# EAGLE board fish_tank_Mosfet_driver (EAGLE 7.5.0)
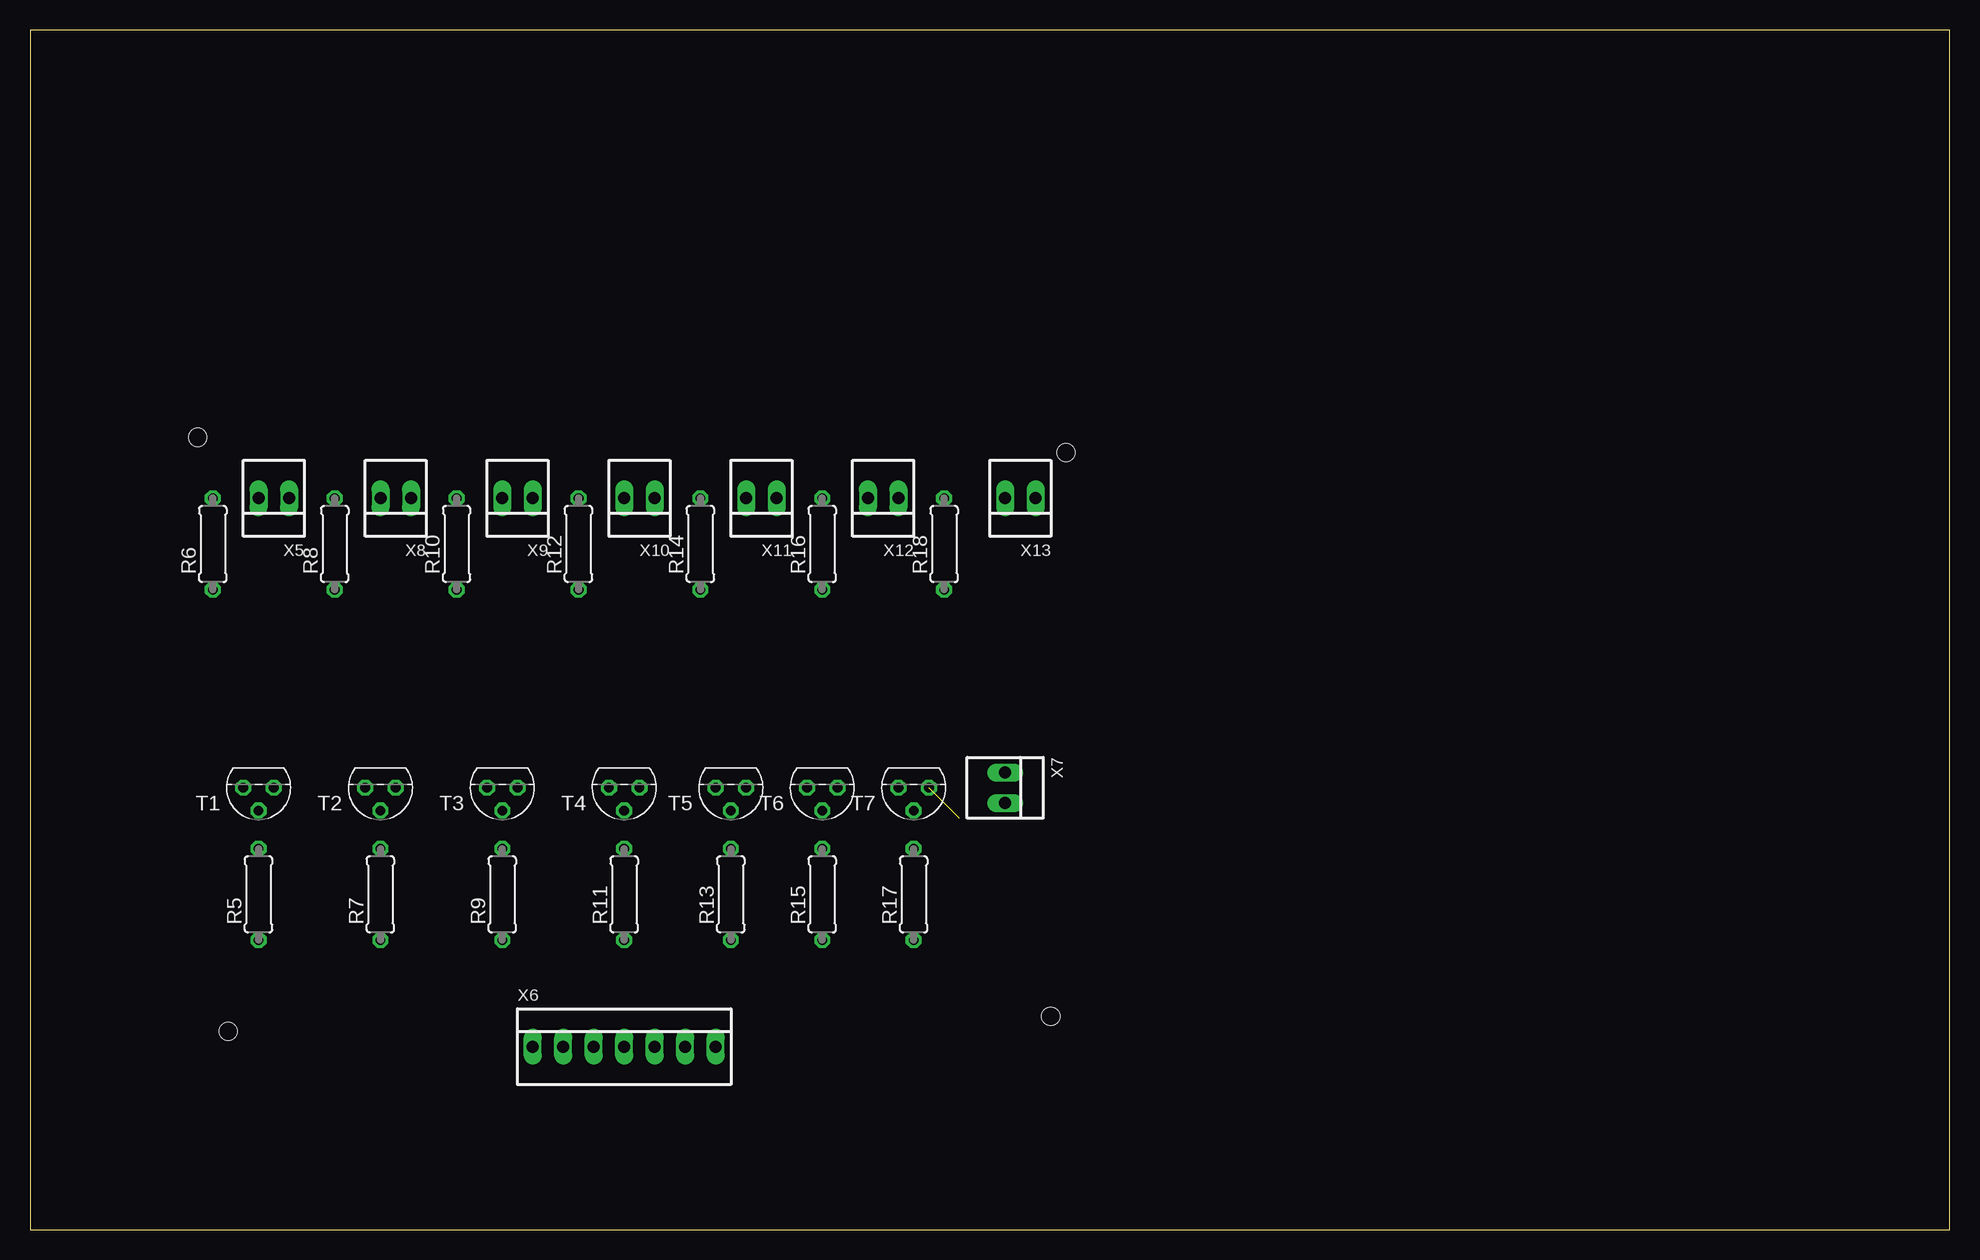
[diagram p0: board, top side]
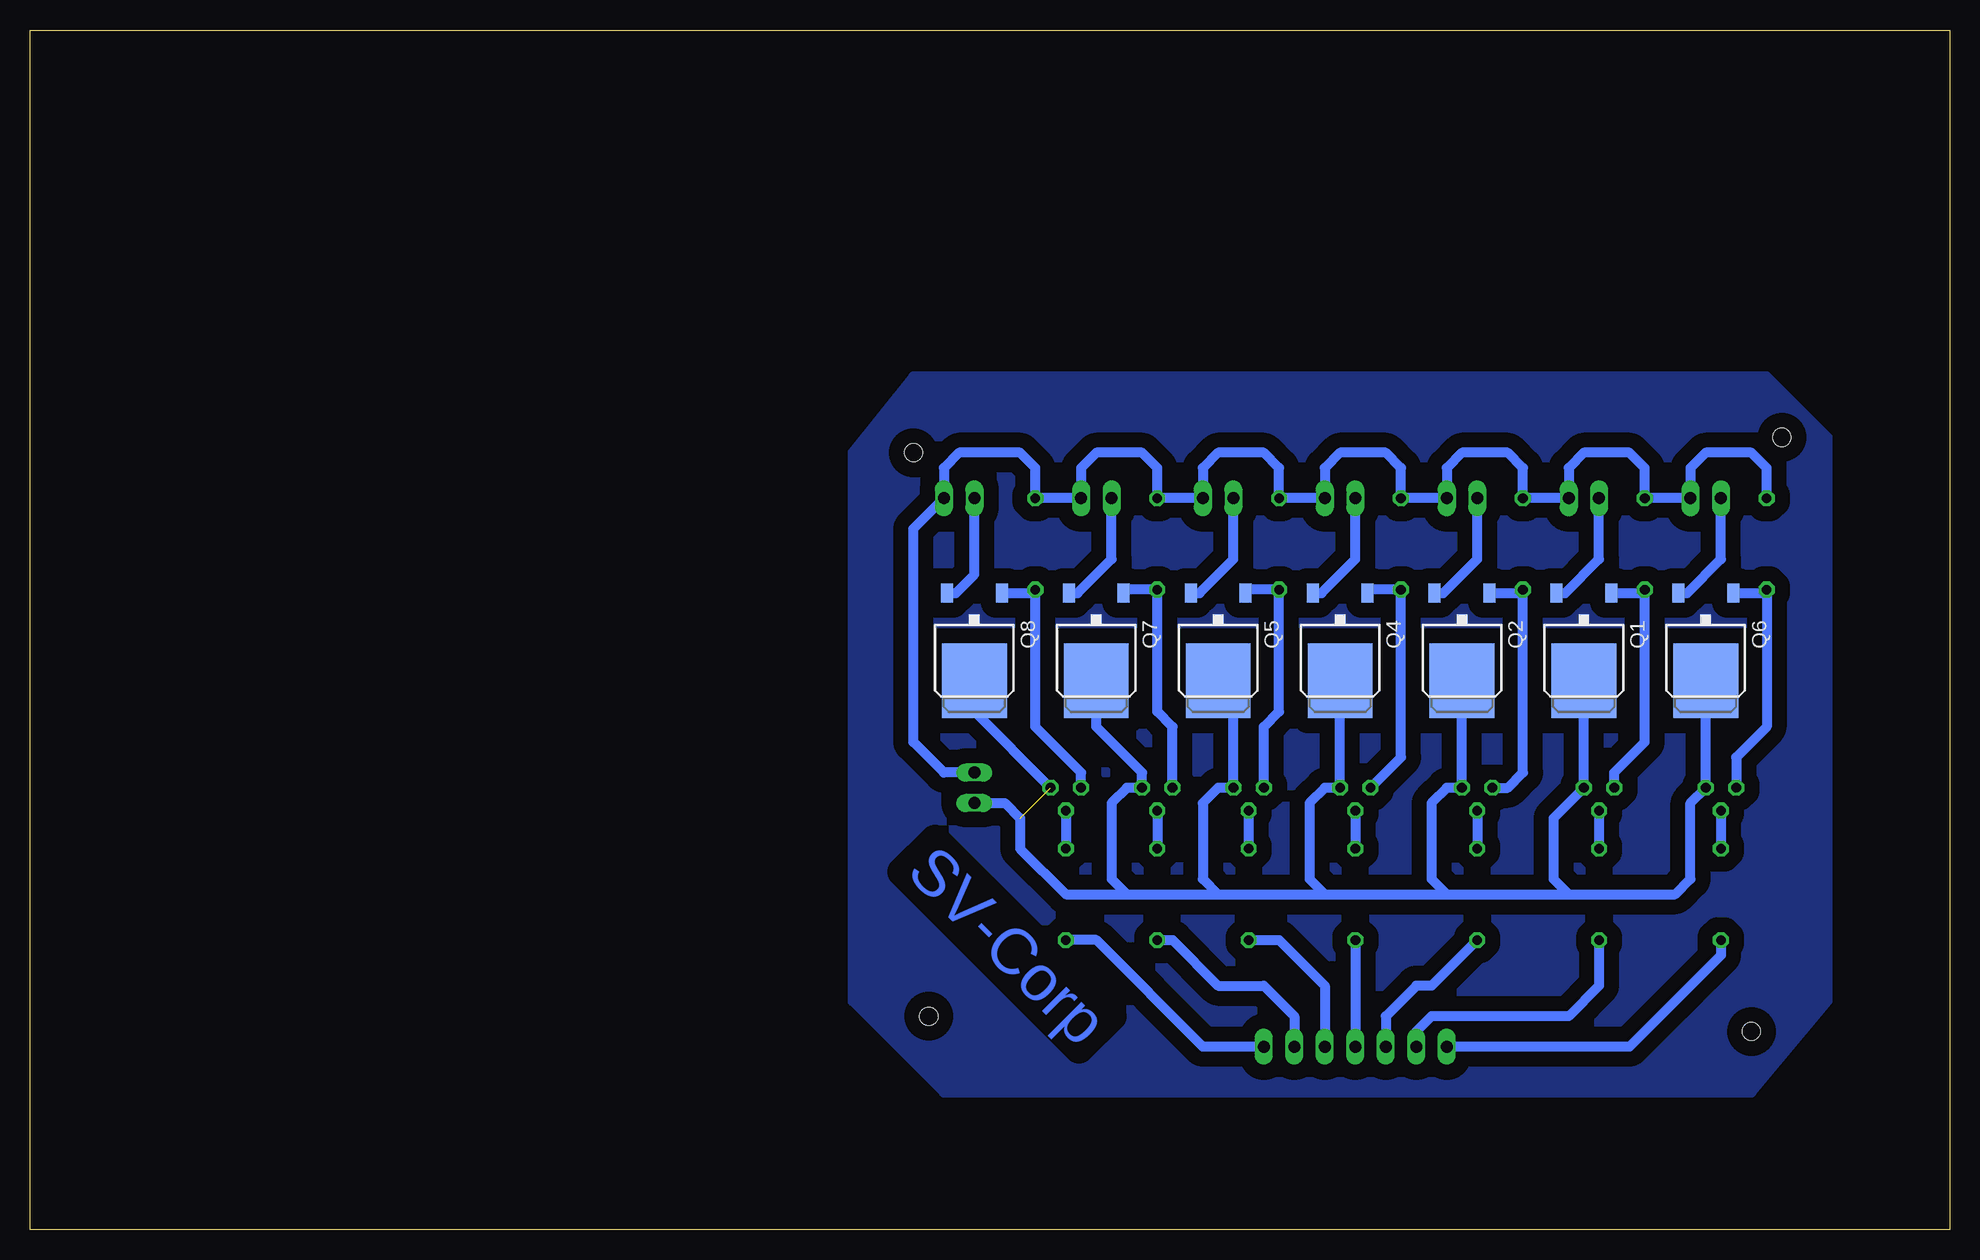
[diagram p1: board, bottom side, seen from below]

Size 160 x 100 mm. Coordinates in mm from the lower left corner, seen from the top.
Outline: 0,0 160,0 160,100 0,100 0,0
Copper layers (1*16): Top 0.035mm / dielectric 1.5mm / Bottom 0.035mm
Design rules "default": minimum track width 10mil, minimum drill 24mil, track to track 8mil, track to pad 8mil, pad to pad 8mil, via to via 8mil, smd to smd 8mil, copper to edge 40mil, drill to drill 8mil, minimum pad ring 10mil, minimum via ring 8mil, stop-mask expansion 4mil, vias tented up to drill 0mil, thermal gap 10mil
Holes 1.5 mm at 16.51,16.51 85.09,17.78 86.36,64.77 13.97,66.04

## Footprints (pad centres in the part's own frame; a part is rotated, then mirrored left to right if it is on the bottom)
D-PAK_TO252AA = smd 1 x 1.6: 1 -2.28,-4.8; 3 2.28,-4.8 | smd 5.4 x 6.2: 4 0,2.5
0207/7 = drill 0.813 octagon: 1 -3.81,0; 2 3.81,0
TO92 = drill 0.813 octagon: 1 1.27,0; 2 0,1.905; 3 -1.27,0
22-23-2021 = drill 1 long: 1 -1.27,0; 2 1.27,0
22-23-2071 = drill 1 long: 1 -7.62,0; 2 -5.08,0; 3 -2.54,0; 4 0,0; 5 2.54,0; 6 5.08,0; 7 7.62,0

## Placement (x,y rotation side)
Q1  IRFR5305  [D-PAK_TO252AA]  30.48,48.26 180 bottom
Q2  IRFR5305  [D-PAK_TO252AA]  40.64,48.26 180 bottom
Q4  IRFR5305  [D-PAK_TO252AA]  50.8,48.26 180 bottom
Q5  IRFR5305  [D-PAK_TO252AA]  60.96,48.26 180 bottom
Q6  IRFR5305  [D-PAK_TO252AA]  20.32,48.26 180 bottom
Q7  IRFR5305  [D-PAK_TO252AA]  71.12,48.26 180 bottom
Q8  IRFR5305  [D-PAK_TO252AA]  81.28,48.26 180 bottom
R5  1k  [0207/7]  19.05,27.94 90 top
R6  10k  [0207/7]  15.24,57.15 90 top
R7  1k  [0207/7]  29.21,27.94 90 top
R8  10k  [0207/7]  25.4,57.15 90 top
R9  1k  [0207/7]  39.37,27.94 90 top
R10  10k  [0207/7]  35.56,57.15 90 top
R11  1k  [0207/7]  49.53,27.94 90 top
R12  10k  [0207/7]  45.72,57.15 90 top
R13  1k  [0207/7]  58.42,27.94 90 top
R14  10k  [0207/7]  55.88,57.15 90 top
R15  1k  [0207/7]  66.04,27.94 90 top
R16  10k  [0207/7]  66.04,57.15 90 top
R17  1k  [0207/7]  73.66,27.94 90 top
R18  10k  [0207/7]  76.2,57.15 90 top
T1  2N3904  [TO92]  19.05,36.83 180 top
T2  2N3904  [TO92]  29.21,36.83 180 top
T3  2N3904  [TO92]  39.37,36.83 180 top
T4  2N3904  [TO92]  49.53,36.83 180 top
T5  2N3904  [TO92]  58.42,36.83 180 top
T6  2N3904  [TO92]  66.04,36.83 180 top
T7  2N3904  [TO92]  73.66,36.83 180 top
X5  22-23-2021  [22-23-2021]  20.32,60.96 180 top
X6  7 pin connector  [22-23-2071]  49.53,15.24 0 top
X7  22-23-2021  [22-23-2021]  81.28,36.83 270 top
X8  22-23-2021  [22-23-2021]  30.48,60.96 180 top
X9  22-23-2021  [22-23-2021]  40.64,60.96 180 top
X10  22-23-2021  [22-23-2021]  50.8,60.96 180 top
X11  22-23-2021  [22-23-2021]  60.96,60.96 180 top
X12  22-23-2021  [22-23-2021]  71.12,60.96 180 top
X13  22-23-2021  [22-23-2021]  82.55,60.96 180 top

## Library data of the parts
Q1 Q2 Q4-Q8 = transistor-power
R5-R18 = rcl
T1-T7 = transistor
X5 X7-X13 = con-molex; MF: MOLEX; MPN: 22-23-2021; OC_FARNELL: 1462926; OC_NEWARK: 25C3832
X6 = con-molex; MF: MOLEX; MPN: 22-23-2071; OC_FARNELL: 1654534; OC_NEWARK: 56H0445

## Nets
GND: Q1.4 Q2.4 Q4.4 Q5.4 Q6.4 Q7.4 Q8.4 T1.3 T2.3 T3.3 T4.3 T5.3 T6.3 T7.3 X7.2
N$34: Q6.1 R6.1 T1.1
N$35: R5.2 T1.2
N$36: Q6.3 X5.2
N$37: R5.1 X6.1
N$39: Q1.1 R8.1 T2.1
N$40: R7.2 T2.2
N$41: Q1.3 X8.2
N$42: R7.1 X6.2
N$43: Q2.1 R10.1 T3.1
N$44: R9.2 T3.2
N$45: Q2.3 X9.2
N$46: R9.1 X6.3
N$47: Q4.1 R12.1 T4.1
N$48: R11.2 T4.2
N$49: Q4.3 X10.2
N$50: R11.1 X6.4
N$51: Q5.1 R14.1 T5.1
N$52: R13.2 T5.2
N$53: Q5.3 X11.2
N$54: R13.1 X6.5
N$55: Q7.1 R16.1 T6.1
N$56: R15.2 T6.2
N$58: Q7.3 X12.2
N$59: R15.1 X6.6
N$60: Q8.1 R18.1 T7.1
N$62: R17.2 T7.2
N$67: Q8.3 X13.2
N$68: R17.1 X6.7
VDD: R6.2 R8.2 R10.2 R12.2 R14.2 R16.2 R18.2 X5.1 X7.1 X8.1 X9.1 X10.1 X11.1 X12.1 X13.1

## Tracks (layer width: path | path; a pad name or v marks a point on that pad's centre or on a via)
GND  (1 unrouted)
  Bottom 0.813: Q6.4 T1.3 21.59,35.56 21.59,29.21 22.86,27.94 31.75,27.94 | Q1.4 T2.3 33.02,34.29 33.02,29.21 31.75,27.94 | Q2.4 T3.3 41.91,36.83 43.18,35.56 43.18,29.21 41.91,27.94 | Q4.4 T4.3 52.07,36.83 53.34,35.56 53.34,29.21 52.07,27.94 | Q5.4 61,45.72 62.23,45.72 59.69,43.18 T5.3 60.96,36.83 62.23,35.56 62.23,29.21 60.96,27.94 | Q7.4 71.12,41.91 67.31,38.1 T6.3 68.58,36.83 69.85,35.56 69.85,29.21 68.58,27.94 | T7.3 81.28,43.18 Q8.4 81.28,46.99 | X7.2 78.74,35.56 77.47,34.29 77.47,31.75 73.66,27.94 68.58,27.94 | 68.58,27.94 60.96,27.94 | 60.96,27.94 52.07,27.94 | 52.07,27.94 41.91,27.94 | 41.91,27.94 31.75,27.94
N$1
  pour Bottom (isolate 1.27): 15.24,71.12 86.36,71.12 91.44,64.77 91.44,19.05 83.82,11.43 16.51,11.43 10.16,19.05 10.16,66.04
N$34
  Bottom 0.813: Q6.1 15.52,53.06 R6.1 15.24,41.91 17.78,39.37 T1.1
N$35
  Bottom 0.813: T1.2 R5.2
N$36
  Bottom 0.813: Q6.3 21.87,53.06 19.05,55.88 X5.2
N$37
  Bottom 0.813: R5.1 19.05,22.86 26.67,15.24 X6.1
N$39
  Bottom 0.813: Q1.1 25.68,53.06 R8.1 25.4,40.64 27.94,38.1 T2.1
N$40
  Bottom 0.813: T2.2 R7.2
N$41
  Bottom 0.813: Q1.3 32.03,53.06 29.21,55.88 X8.2
N$42
  Bottom 0.813: R7.1 29.21,20.32 31.75,17.78 43.18,17.78 44.45,16.51 X6.2
N$43
  Bottom 0.813: Q2.1 35.84,53.06 R10.1 35.56,38.1 36.83,36.83 T3.1
N$44
  Bottom 0.813: T3.2 R9.2
N$45
  Bottom 0.813: Q2.3 42.19,53.06 39.37,55.88 X9.2
N$46
  Bottom 0.813: R9.1 43.18,20.32 44.45,20.32 46.99,17.78 X6.3
N$47
  Bottom 0.813: Q4.1 48.24,53.34 R12.1 45.72,39.37 T4.1
N$48
  Bottom 0.813: T4.2 R11.2
N$49
  Bottom 0.813: Q4.3 52.35,53.06 49.53,55.88 X10.2
N$50
  Bottom 0.813: R11.1 X6.4
N$51
  Bottom 0.813: Q5.1 58.4,53.34 R14.1 55.88,43.18 57.15,41.91 T5.1
N$52
  Bottom 0.813: T5.2 R13.2
N$53
  Bottom 0.813: Q5.3 62.51,53.06 59.69,55.88 X11.2
N$54
  Bottom 0.813: R13.1 55.88,24.13 52.07,20.32 X6.5
N$55
  Bottom 0.813: Q7.1 68.56,53.34 R16.1 66.04,43.18 64.77,41.91 T6.1
N$56
  Bottom 0.813: T6.2 R15.2
N$58
  Bottom 0.813: Q7.3 72.67,53.06 69.85,55.88 X12.2
N$59
  Bottom 0.813: R15.1 64.77,24.13 60.96,20.32 57.15,20.32 54.61,17.78 X6.6
N$60
  Bottom 0.813: Q8.1 76.48,53.06 R18.1 76.2,41.91 72.39,38.1 T7.1
N$62
  Bottom 0.813: T7.2 R17.2
N$67
  Bottom 0.813: Q8.3 82.83,53.06 81.28,54.61 X13.2
N$68
  Bottom 0.813: X6.7 62.23,15.24 71.12,24.13 R17.1
VDD
  Bottom 0.813: R6.2 15.24,63.5 16.51,64.77 20.32,64.77 21.59,63.5 X5.1 R8.2 25.4,63.5 26.67,64.77 30.48,64.77 31.75,63.5 X8.1 R10.2 35.56,63.5 36.83,64.77 40.64,64.77 41.91,63.5 X9.1 R12.2 45.72,63.5 46.99,64.77 50.8,64.77 52.07,63.5 X10.1 R14.2 55.88,63.5 57.15,64.77 60.96,64.77 62.23,63.5 X11.1 R16.2 66.04,63.5 67.31,64.77 71.12,64.77 72.39,63.5 X12.1 R18.2 76.2,63.5 77.47,64.77 82.55,64.77 83.82,63.5 X13.1 86.36,58.42 86.36,40.64 83.82,38.1 X7.1

## Text on the board
Bottom: SV-Corp